# Altium PCB hat_template 2021V3.PcbDoc (part 1 of 2)
Units mil, origin at the board's own origin, x right, y up, seen from the top; angles counter-clockwise.
Board outline 2519.68 x 3346.46 mil, 4 copper layers (Top Side, Ground Plane, Power Plane, Bottom Side), stack 33.234 mil thick; 110 components, 73 nets, 370 pads, 68 vias.
Unrouted connection lines stored in the file: 141.
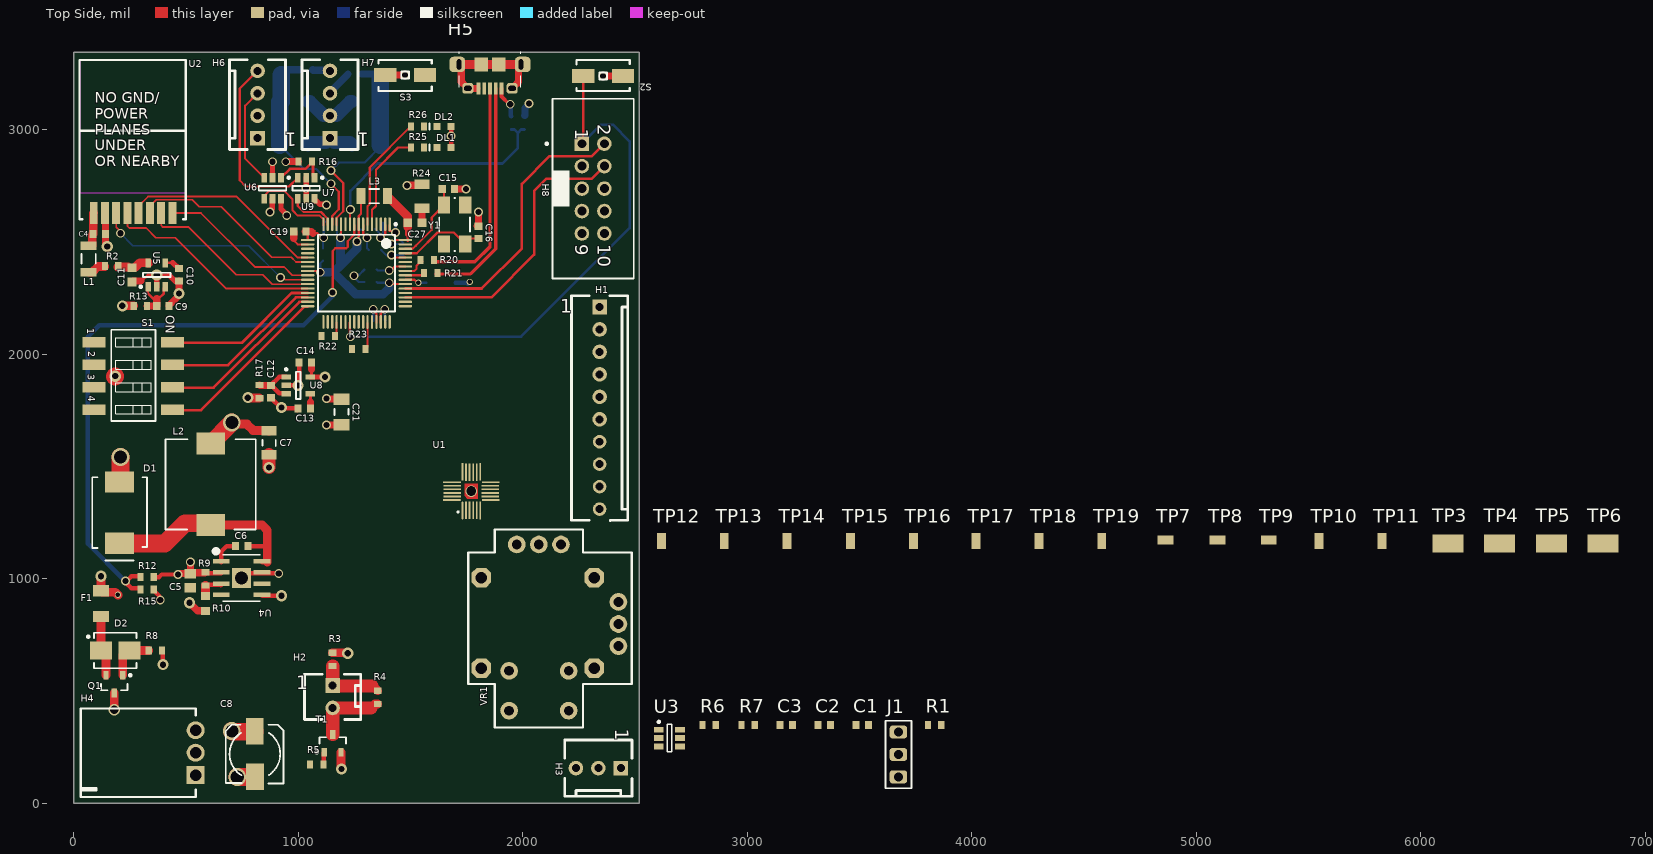
[diagram p0: Top Side view]
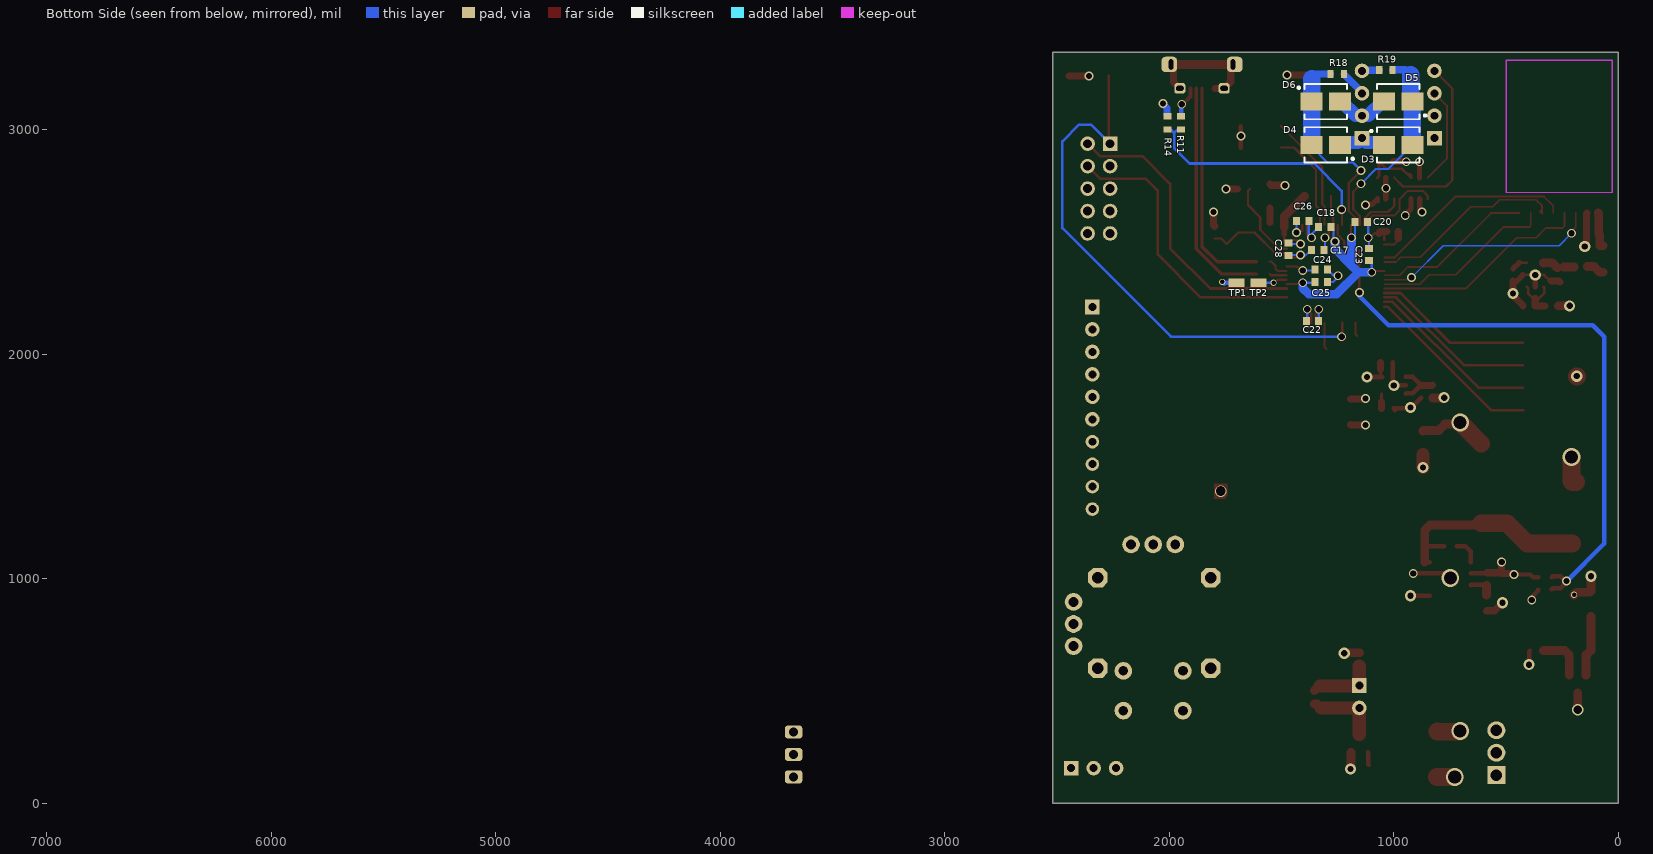
[diagram p1: Bottom Side view, seen from below]
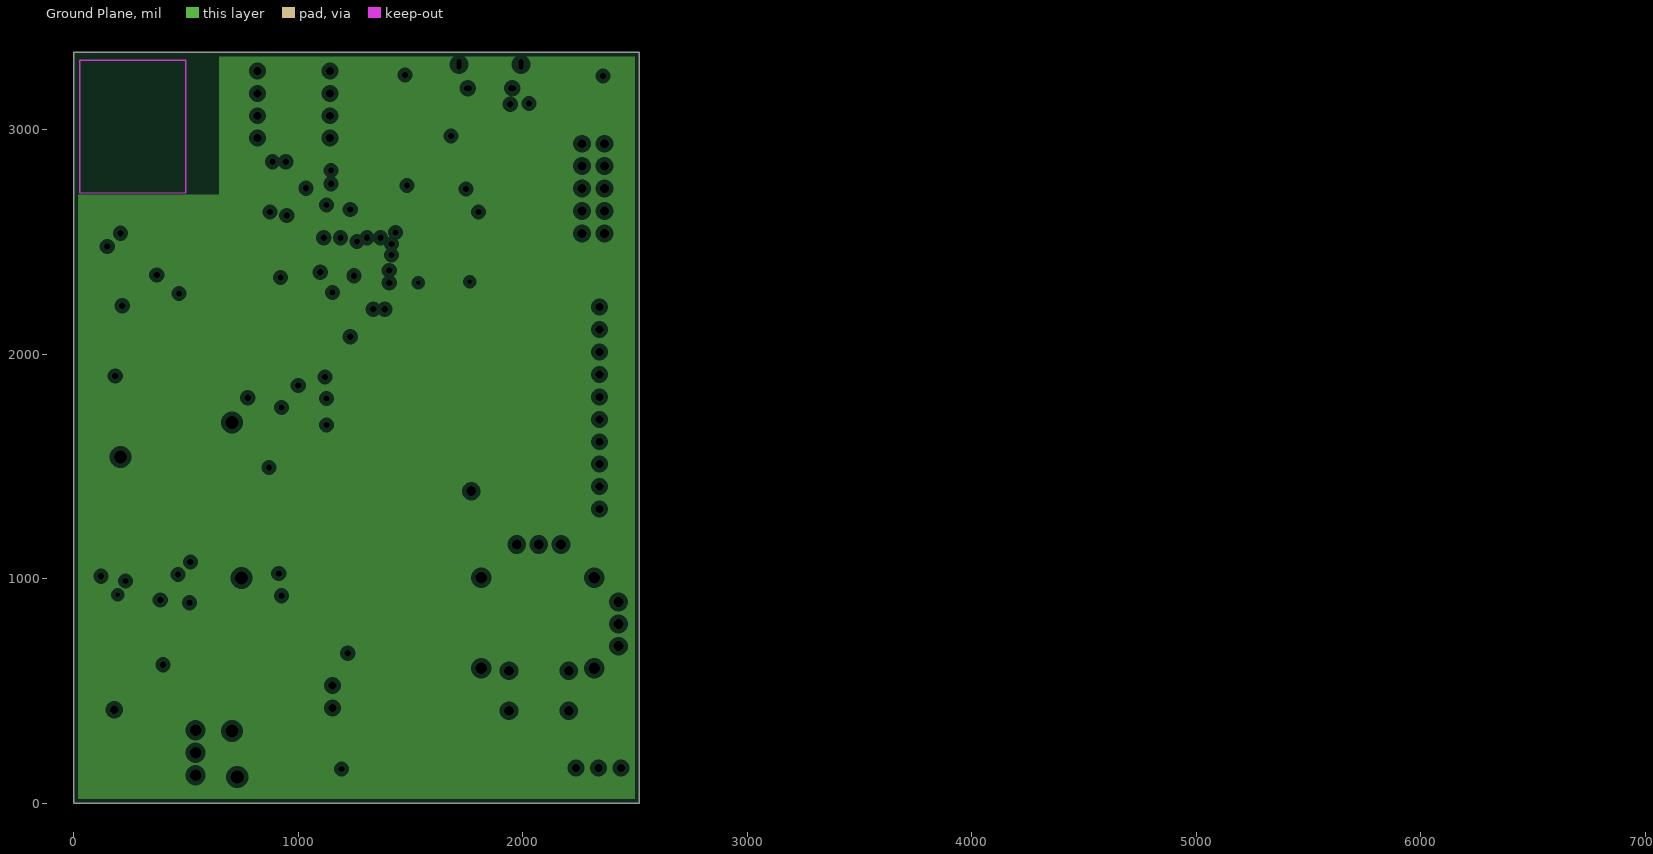
[diagram p2: Ground Plane, clearances drawn from the general rule]
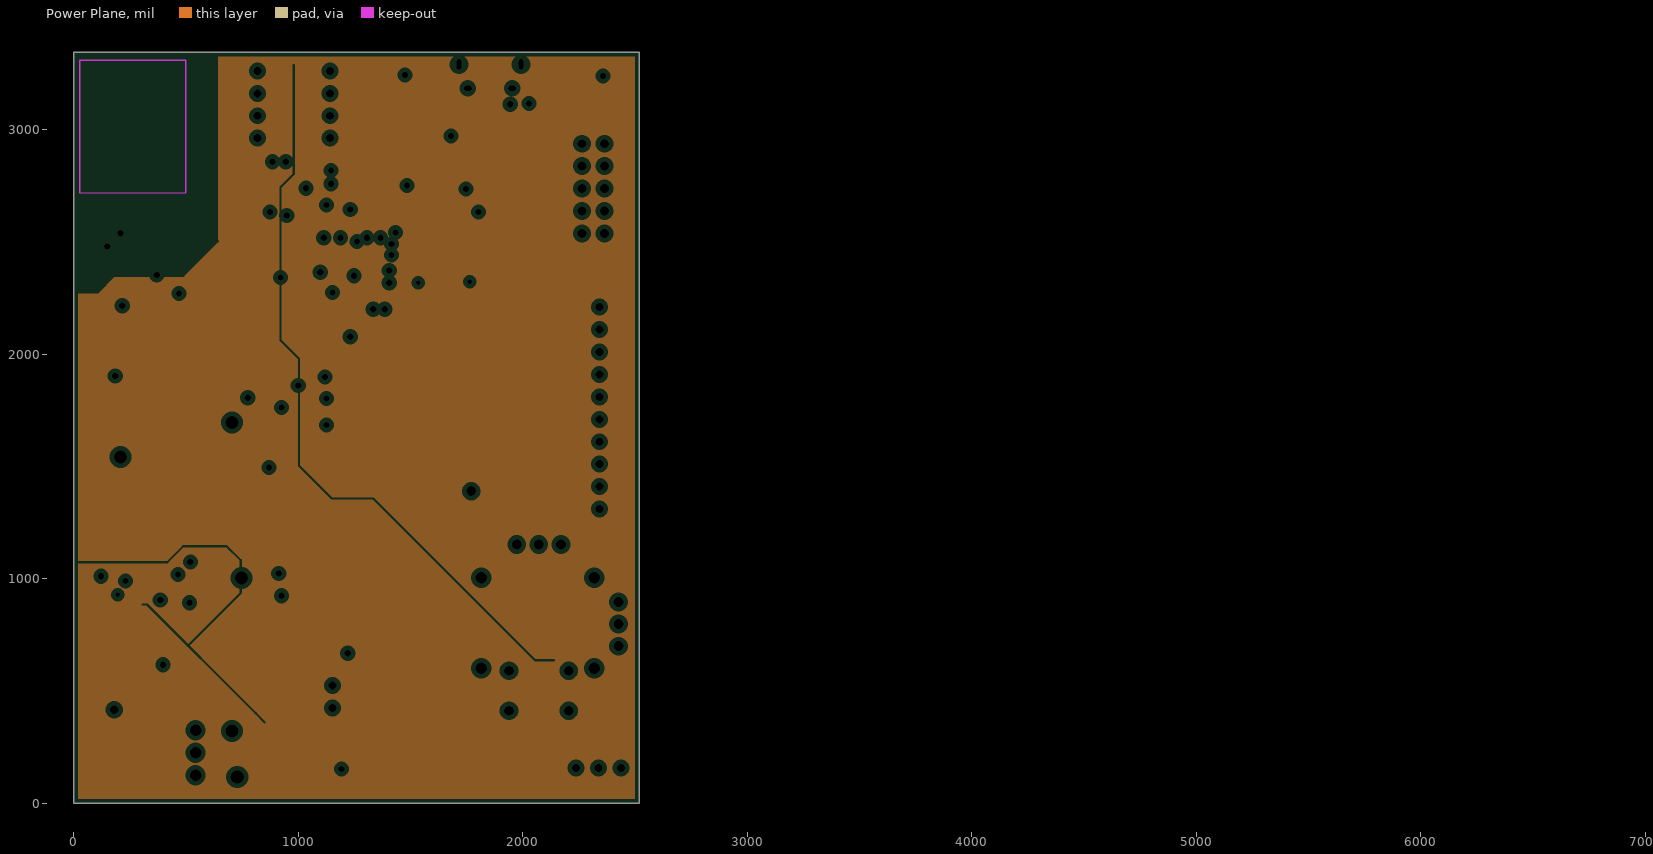
[diagram p3: Power Plane, clearances drawn from the general rule]

## Layer stack, top to bottom
Top Solder: solder mask 0.4, Solder Resist, Dk 3.5
Top Side: signal copper 1.4
Dielectric 1: core 12.6, FR-4, Dk 4.8
Ground Plane: plane copper 1.4169
Dielectric 3: prepreg 5, Dk 4.2
Power Plane: plane copper 1.4169
Dielectric 4: core 10, Dk 4.2
Bottom Side: signal copper 1.4
Bottom Solder: solder mask 0.4, Solder Resist, Dk 3.5

## Board outline
0,3346.46 2519.68,3346.46 2519.68,0 0,0 0,3346.46

## Design rules (kind name [scope] priority, off if disabled: settings)
BoardOutlineClearance [All] p1: gap=19.68 ignorepadtopadclearanceinfootprint=FALSE
Clearance Min_Clearance_Circuit_Labs [All] p1: gap=5.91 ignorepadtopadclearanceinfootprint=FALSE except(0: Arc-Hole Track-Hole SMDPad-Hole THPad-Hole Via-Hole Fill-Hole Poly-Hole Region-Hole Text-Hole)
DiffPairsRouting [All] p1: maxlimit=10 minlimit=10 mostfreqgap=10 toplayer_minwidth=15 toplayer_maxwidth=15 toplayer_prefwidth=15 bottomlayer_minwidth=15 bottomlayer_maxwidth=15 bottomlayer_prefwidth=15 maxuncoupledlength=500
FanoutControl Fanout_BGA [IsBGA] p1 off: bgadir=Out bgaviamode=Centered fanoutstyle=Auto fanoutdirection=Alternating viagrid=1 // Fanout_BGA (Default Rule)
HoleSize [All] p1: absolutevalues=TRUE maxlimit=393.7 minlimit=11.81 maxpercent=80.000 minpercent=20.000
MinimumAnnularRing [All] p1: minimumring=3.94
MinimumSolderMaskSliver [All] p1: minsoldermaskwidth=9.84
NetAntennae [All] p1: netantennaetolerance=39.37
PasteMaskExpansion [All] p1 off: expansion=7.87
PlaneClearance [All] p1: clearance=20
PlaneConnect [All] p1: planeconnectstyle=Relief reliefexpansion=20 reliefentries=4 reliefconductorwidth=10 reliefairgap=10
PolygonConnect [All] p1: connectstyle=Relief reliefconductorwidth=10 reliefentries=4 polygonreliefangle="90 Angle" airgapwidth=10
RoutingVias [All] p1: holewidth=19.68 width=39.37 viastyle="Through Hole" minholewidth=11.81 minwidth=23.62 maxholewidth=39.37 maxwidth=78.74
SMDNeckDown [All] p1 off: percent=50.000
SMDToCorner [All] p1: distance=98425
SMDToPlane [All] p1: distance=1968504
SilkToSolderMaskClearance SilkscreenOverComponentPads [IsPad] p1: minsilkscreentomaskgap=10 clearancetoexposedcopper=TRUE
SolderMaskExpansion [All] p1: expansion=4
ViasUnderSMD [All] p1: allowed=FALSE
Width [All] p1: maxlimit=78.74 minlimit=5.91 preferedwidth=11.81
21 further rules are at their usual default settings.

## Classes and differential pairs
component class SAM4S_Piezo_LED: C15 C16 C17 C18 C19 C20 C21 C22 C23 C24 C25 C26 C27 C28 DL1 DL2 H8 L3 R20 R21 R22 R23 R24 R25 R26 S2 S3 TP1 TP2 TP3 TP4 TP5 TP6 TP7 TP8 TP9 TP10 TP11 TP12 TP13 TP14 TP15 TP16 TP17 TP18 TP19 U9 Y1
component class Power_USB: C5 C6 C7 C8 C9 C10 C11 C12 C13 C14 D1 D2 D3 D4 D5 D6 F1 H4 H5 H6 H7 L2 Q1 R8 R9 R10 R11 R12 R13 R14 R15 R16 R17 R18 R19 U4 U5 U6 U7 U8
component class IMU_Radio: C1 C2 C3 C4 H1 H2 H3 J1 L1 R1 R2 R3 R4 R5 R6 R7 S1 T1 U1 U2 U3 VR1
differential pair D: +D_P -D_N

## Components (designator, comment, footprint, x,y, rotation, side; value= is the part's Value field where it differs from the comment)
C1 "100nF" CAPC1608L 3511.8,350.39 r0 top
C2 "10nF" CAPC1608L 3342.51,350.39 r0 top
C3 "100nF" CAPC1608L 3173.22,350.39 r0 top
C4 "10uF" CAPC1608L 114.17,2535.43 r180 top
C5 "10uF" CAPC2012L 519.68,992.13 r90 top
C6 "100nF" CAPC1608L 748.03,1145.67 r0 top
C7 "47uF" CAPC3216L 870.08,1606.3 r90 top
C8 "100uF/16V" NICH-1 807.09,220.47 r90 top
C9 "1uF" CAPC1608L 397.64,2216.54 r180 top
C10 "10nF" CAPC1608L 468.5,2354.33 r90 top
C11 "4.7uF" CAPC1608N 259.84,2354.33 r90 top
C12 "1uF" CAPC1608L 877.95,1834.65 r90 top
C13 "10nF" CAPC1608L 1027.56,1759.84 r0 top
C14 "2.2uF" CAPC1608L 1031.5,1964.57 r0 top
C15 "27pF" CAPC1608L 1669.29,2736.22 r180 top
C16 "27pF" CAPC1608L 1803.15,2543.31 r270 top
C17 "100nF" CAPC1608L 1338.58,2464.57 r180 bottom
C18 "100nF" CAPC1608L 1307.09,2566.93 r0 bottom
C19 "100nF" CAPC1608L 1007.87,2547.24 r180 top
C20 "100nF" CAPC1608L 1145.67,2590.55 r180 bottom
C21 "22uF" CAPC3216N 1192.91,1744.09 r90 top
C22 "100nF" CAPC1608L 1362.2,2149.61 r180 bottom
C23 "100nF" CAPC1608L 1110.24,2444.88 r90 bottom
C24 "100nF" CAPC1608L 1322.83,2377.95 r0 bottom
C25 "100nF" CAPC1608L 1322.83,2322.83 r180 bottom
C26 "100nF" CAPC1608L 1405.51,2594.49 r0 bottom
C27 "4.7uF" CAPC1608N 1519.68,2586.61 r180 top
C28 "100nF" CAPC1608L 1468.5,2468.5 r90 bottom
D1 "SCHOTTKY 30V 4A" SMC 204.72,1295.28 r270 top
D2 "DIODE ZENER 5.6V" DO-214AA_SCL 185.04,681.1 r0 top
D3 "DIODE ZENER 5.6V" DO-214AA_SCL 980.32,2933.07 r180 bottom
D4 "DIODE ZENER 5.6V" DO-214AA_SCL 1303.15,2933.07 r0 bottom
D5 "DIODE ZENER 5.6V" DO-214AA_SCL 980.32,3125.98 r0 bottom
D6 "DIODE ZENER 5.6V" DO-214AA_SCL 1303.15,3125.98 r180 bottom
DL1 "Blue" WL-SMCW0603 1618.11,2921.26 r0 top
DL2 "Dark Green" WL-SMCW0603 1618.11,3015.75 r0 top
F1 "2A" RESC3216N 122.05,889.76 r90 top
H1 "10 Pin Molex KK Hdr" MOLEX_KK_10_HDR 2342.52,2211.02 r270 top
H2 "2 Pin Molex KK HDR" MOLEX_KK_2_HDR 1153.54,525.2 r270 top
H3 "3 Pin Molex KK Hdr" MOLEX_KK_3_HDR 2437.01,157.48 r180 top
H4 "Battery_HEADER_3pin" BATT_HEADER_3POS 543.31,225.98 r90 top
H5 "JS_USB_MICRO_B" FCI_USB_10118194-0001LF 1854.33,3348.43 r180 top
H6 "4 Pin Molex KK Hdr" MOLEX_KK_4_HDR 818.9,2962.99 r90 top
H7 "4 Pin Molex KK Hdr" MOLEX_KK_4_HDR 1141.73,2962.99 r90 top
H8 "Header 5X2 Vert" IDC2.54-V10D 2313.78,2738.58 r270 top
J1 "100Mil Jumper" JMP2.54-CO 3673.22,118.11 r90 top
L1 "1A max, Idc 0.3R," INDC3216L 66.93,2425.2 r270 top
L2 "IND 5.2UH 6A" INDUCTOR5u2 610.24,1421.26 r90 top
L3 "1A max, Idc 0.3R," INDC3216L 1338.58,2704.72 r180 top
Q1 "SSM3J328R,LF" SOT23_L 181.1,531.5 r270 top
R1 "0R" RESC1608L 3834.63,350.39 r0 top
R2 "0R" RESC1608L 169.29,2393.7 r180 top
R3 "0R" RESC1608L 1153.54,641.73 r90 top
R4 "1K" RESC1608L 1354.33,472.44 r90 top
R5 "0R" RESC1608L 1082.68,173.23 r0 top
R6 "0R" RESC1608L 2830.7,350.39 r0 top
R7 "0R" RESC1608L 3003.93,350.39 r0 top
R8 "270R" RESC1608L 364.17,681.1 r180 top
R9 "15K" RESC1608L 586.61,1000 r90 top
R10 "47K" RESC1608N 586.61,889.76 r90 top
R11 "27K" RESC1608L 1948.82,3031.5 r90 bottom
R12 "36K" RESC1608L 326.77,1007.87 r0 top
R13 "0R" RESC1608L 297.24,2216.54 r0 top
R14 "47K" RESC1608L 2007.87,3031.5 r270 bottom
R15 "24K" RESC1608L 326.77,952.76 r180 top
R16 "0R" RESC1608L 1031.5,2858.27 r180 top
R17 "0R" RESC1608L 826.77,1834.65 r90 top
R18 "360R" RESC1608L 1251.97,3248.03 r180 bottom
R19 "360R" RESC1608L 1035.43,3267.72 r0 bottom
R20 "27R" RESC1608L 1574.8,2421.26 r180 top
R21 "27R" RESC1608L 1590.55,2362.2 r180 top
R22 "2K" RESC1608L 1133.86,2082.68 r180 top
R23 "2K" RESC1608L 1269.69,2023.62 r180 top
R24 "1R" RESC3216L 1551.18,2704.72 r270 top
R25 "360R" RESC1608L 1531.5,2921.26 r180 top
R26 "360R" RESC1608L 1531.5,3015.75 r180 top
S1 "WS_SW DIP-4" "DIP_SW_4WAY_SMD -" 90.55,2054.33 r270 top
S2 "EVQPNF05M" EVQPNF05M 2358.27,3240.16 r0 top
S3 "EVQPNF05M" EVQPNF05M 1476.38,3244.09 r180 top
T1 "BSH105,215" SOT23_L 1153.54,267.72 r90 top
TP1 "TP_0603" TP_0603 1700.79,2318.9 r180 bottom
TP2 "Erase" TP_0603 1602.36,2318.9 r180 bottom
TP3 "GND" TP_1206 6122.03,1157.47 r0 top value=TP
TP4 "GND" TP_1206 6350.38,1157.47 r0 top value=TP
TP5 "GND" TP_1206 6582.66,1157.47 r0 top value=TP
TP6 "GND" TP_1206 6811.01,1157.47 r0 top value=TP
TP7 "3V3 Radio" TP_0603 4862.19,1173.22 r0 top
TP8 "5V" TP_0603 5094.47,1173.22 r0 top
TP9 "VBUS" TP_0603 5322.82,1173.22 r0 top
TP10 "3V3" TP_0603 5547.23,1169.29 r90 top
TP11 "VBATT" TP_0603 5826.76,1169.29 r90 top
TP12 "LED Signal" TP_0603 2618.1,1169.29 r90 top
TP13 "Radio MISO" TP_0603 2897.63,1169.29 r90 top
TP14 "Radio MOSI" TP_0603 3177.16,1169.29 r90 top
TP15 "IMU DATA" TP_0603 3460.62,1169.29 r90 top
TP16 "Buzzer High" TP_0603 3740.15,1169.29 r90 top
TP17 "SWCLK" TP_0603 4019.67,1169.29 r90 top
TP18 "Radio CLK" TP_0603 4299.2,1169.29 r90 top
TP19 "IMU CLK" TP_0603 4578.73,1169.29 r90 top
U1 "Comment" QUAD24 1732,1338 r90 top locked
U2 "nRF24 SMD" NRF24 26.43,2602.36 r0 top
U3 "SN74LVC1T45" SOT23-6_N 2653.53,291.33 r0 top
U4 "Comment" RD_8_1 748.03,1003.94 r0 top locked value=Value
U5 "CAT6219-330TDGT3" SOT95P280X145-5N 370.08,2354.33 r90 top
U6 "SN74LVC1T45" SOT23-6_N 885.83,2740.16 r270 top
U7 "SN74LVC1T45" SOT23-6_N 1035.43,2740.16 r270 top
U8 "CAT6219-330TDGT3" SOT95P280X145-5N 1000,1862.2 r0 top
U9 "Comment" LQFP64_L 1259.84,2362.2 r270 top locked
VR1 "Joystick 10k with Sw" Joystick_Sw 2072.05,1153.54 r90 top
Y1 "12MHz" 6.0X3.5-4 1696.85,2578.74 r90 top

## Footprints (in the part's own frame and the unit in brackets; to place one, negate y for a bottom-side part, rotate by r counter-clockwise, add the part's x,y. Pads: shape width x height; smd on the part's side, far side on the other; paste and mask are expansions set on the pad)
6.0X3.5-4 [mm] "4 SMD 6.0X3.5 mm No Lead Crystal"
  rect 1.9x1.4 smd: 1(-2.2,-1.2) 2(2.2,-1.2) 3(2.2,1.2) 4(-2.2,1.2)
  silkscreen extent -3,-1.75 3,1.75, body extent -3,-1.75 3,1.75, height 1.2
BATT_HEADER_3POS [mil]
  rect 80x80 hole 50: 1(-100,0)
  round 80 hole 50: 2(0,0) 3(100,0)
  silkscreen extent -197,0 197,512
CAPC1608L [mm] "Chip Capacitor, Body 1.6x0.8mm, IPC High Density"
  rect 0.8x0.9 smd: 1(-0.7,0) 2(0.7,0)
  body extent -0.87,-0.48 0.87,0.48, height 0.85
CAPC1608N [mm] "Chip Capacitor, Body 1.6x0.8mm, IPC Medium Density"
  rect 1x1 smd: 1(-0.8,0) 2(0.8,0)
  body extent -0.87,-0.48 0.87,0.48, height 0.85
CAPC2012L [mm] "Chip Capacitor, Body 2.0x1.3mm, IPC High Density"
  rect 1.1x1.3 smd: 1(-0.8,0) 2(0.8,0)
  body extent -1.1,-0.72 1.1,0.72, height 1.1
CAPC3216L [mm] "Chip Capacitor, Body 3.2x1.6mm, IPC High Density"
  rect 1.1x1.7 smd: 1(-1.35,0) 2(1.35,0)
  silkscreen extent -0.35,-0.75 0.35,0.75, body extent -1.7,-0.9 1.7,0.9, height 1.35
CAPC3216N [mm] "Chip Capacitor, Body 3.2x1.6mm, IPC Medium Density"
  rect 1.3x1.8 smd: 1(-1.45,0) 2(1.45,0)
  silkscreen extent -0.35,-0.8 0.35,0.8, body extent -1.7,-0.9 1.7,0.9, height 1.35
"DIP_SW_4WAY_SMD -" [mm] "DIP Switch; 8 Leads"
  rect 1.2x2.6 smd: 1(0,0) 2(2.54,0) 3(5.08,0) 4(7.62,0) 5(7.62,8.89) 6(5.08,8.9) 7(2.54,8.9) 8(0,8.9)
  silkscreen extent -1.4,1.95 8.9,6.95
DO-214AA_SCL [mm] "Molded Diode, 2-Leads, Body 4.40x3.62mm, IPC Medium Density"
  rect 2.5x2.05 smd: 1(-1.6,0) 2(1.6,0)
  silkscreen extent -3.17,-2 2.4,2
EVQPNF05M [mm] "Panansonic light touch SMD push button switch"
  rect 2.5x1.6 smd: 1(-2.25,0) 2(2.25,0)
  silkscreen extent -3,-1.7 3,1.8, body extent -3,-1.7 3,1.8, height 5
FCI_USB_10118194-0001LF [mm] "Micro USB B Type Receptacle"
  rect 0.4x1.35 smd mask+0.07: 1(-1.3,4.15) 2(-0.65,4.15) 3(0,4.15) 4(0.65,4.15) 5(1.3,4.15)
  rrect50% 1.75x1.75 hole 0.5 slot 1.15 at 90 deg copper offset -0.2,0 paste+0 mask+0.1: 6(-3.5,1.45)
  rrect50% 1.25x1.2 hole 0.55 slot 0.85 at 0 deg: 6(-2.5,4.15) 6(2.5,4.15)
  rect 1.5x1.55 smd: 6(-1,1.45) 6(1,1.45)
  rrect50% 1.75x1.75 hole 0.5 slot 1.15 at 90 deg copper offset 0.2,0 paste+0 mask+0.1: 6(3.5,1.45)
  silkscreen extent -3.5,0 3.5,4
IDC2.54-V10D [mm] "Connector; IDC, Low Profile Male Header, Thru-Hole; 10 Position; Vertical; Pitch 2.54 mm; Body 20.32 x 9.2 x 9.45 mm (LxWxH)"
  rect 1.65x1.65 hole 1: 1(-5.08,-1.27)
  round 1.65 hole 1: 2(-5.08,1.27) 3(-2.54,-1.27) 4(-2.54,1.27) 5(0,-1.27) 6(0,1.27) 7(2.54,-1.27) 8(2.54,1.27) 9(5.08,-1.27) 10(5.08,1.27)
  silkscreen extent -10.16,-5.37 10.16,4.6, body extent -10.16,-4.6 10.16,4.6, height 9.45
INDC3216L [mm] "Chip Inductor, Body 3.2x1.6mm, IPC High Density"
  rect 1x1.8 smd: 1(-1.5,0) 2(1.5,0)
  silkscreen extent -0.55,-0.8 0.55,0.8, body extent -1.75,-0.95 1.75,0.95, height 1.9
INDUCTOR5u2 [mm]
  rect 2.5x3.2 smd: 1(-4.6,0) 2(4.6,0)
  silkscreen extent -5.1,-5.1 5.1,5.1
JMP2.54-CO [mm] "Jumper Change over 2.54mm"
  rrect50% 1.5x2 hole 1: 1(0,0) 2(2.54,0) 3(5.08,0)
  silkscreen extent -1.27,-1.47 6.35,1.47, body extent -1.27,-1.43 6.36,1.43, height 8.45
Joystick_Sw [mm]
  round 2 hole 1.1: 1(0,2.5) 2(0,0) 3(0,-2.5) 4(-6.5,-9) 5(-9,-9) 6(-11.5,-9) 7(-14.3,-3.37) 8(-18.8,-3.37) 9(-18.8,3.37) 10(-14.3,3.37)
  oct 2.2x2.2 hole 1.3: 11(-14,-6.25) 12(-3.75,-6.25) 13(-14,6.5) 14(-3.75,6.5)
  silkscreen extent -20.7,-10.5 1.7,8
LQFP64_L [mm] "Thin QFP, 64-Leads, Body 10x10mm, Pitch 0.5mm, IPC High Density"
  oval 1.55x0.25 smd mask+0.07: 1(-5.525,3.75) 2(-5.525,3.25) 3(-5.525,2.75) 4(-5.525,2.25) 5(-5.525,1.75) 6(-5.525,1.25) 7(-5.525,0.75) 8(-5.525,0.25) 9(-5.525,-0.25) 10(-5.525,-0.75) 11(-5.525,-1.25) 12(-5.525,-1.75) 13(-5.525,-2.25) 14(-5.525,-2.75) 15(-5.525,-3.25) 16(-5.525,-3.75) 33(5.525,-3.75) 34(5.525,-3.25) 35(5.525,-2.75) 36(5.525,-2.25) 37(5.525,-1.75) 38(5.525,-1.25) 39(5.525,-0.75) 40(5.525,-0.25) 41(5.525,0.25) 42(5.525,0.75) 43(5.525,1.25) 44(5.525,1.75) 45(5.525,2.25) 46(5.525,2.75) 47(5.525,3.25) 48(5.525,3.75)
  oval 0.25x1.55 smd mask+0.07: 17(-3.75,-5.525) 18(-3.25,-5.525) 19(-2.75,-5.525) 20(-2.25,-5.525) 21(-1.75,-5.525) 22(-1.25,-5.525) 23(-0.75,-5.525) 24(-0.25,-5.525) 25(0.25,-5.525) 26(0.75,-5.525) 27(1.25,-5.525) 28(1.75,-5.525) 29(2.25,-5.525) 30(2.75,-5.525) 31(3.25,-5.525) 32(3.75,-5.525) 49(3.75,5.525) 50(3.25,5.525) 51(2.75,5.525) 52(2.25,5.525) 53(1.75,5.525) 54(1.25,5.525) 55(0.75,5.525) 56(0.25,5.525) 57(-0.25,5.525) 58(-0.75,5.525) 59(-1.25,5.525) 60(-1.75,5.525) 61(-2.25,5.525) 62(-2.75,5.525) 63(-3.25,5.525) 64(-3.75,5.525)
  silkscreen extent -5.65,-4.35 4.35,4.55, body extent -5,-5 5,5, height 1.6
MOLEX_KK_2_HDR [mil] "MOLEX_KK_2_HDR"
  rect 65x65 hole 35.43: 1(0,0)
  round 65 hole 35.43: 2(100,0)
  silkscreen extent -50,-125 152,125, body extent -44,-121 146,119, height 630
MOLEX_KK_3_HDR [mil] "MOLEX_KK_3_HDR"
  rect 65x65 hole 35.43: 1(0,0)
  round 65 hole 35.43: 2(100,0) 3(200,0)
  silkscreen extent -50,-125 250,125, body extent -44,-120 244,119, height 630
MOLEX_KK_4_HDR [mil] "MOLEX_KK_4_HDR"
  rect 65x65 hole 35.43: 1(0,0)
  round 65 hole 35.43: 2(100,0) 3(200,0) 4(300,0)
  silkscreen extent -50,-125 350,125, body extent -44,-119 343,119, height 630
MOLEX_KK_10_HDR [mil] "MOLEX_KK_10_HDR"
  rect 65x65 hole 35.43: 1(0,0)
  round 65 hole 35.43: 2(100,0) 3(200,0) 4(300,0) 5(400,0) 6(500,0)
  round 60 hole 35.43: 7(600,0) 8(700,0) 9(800,0) 10(900,0)
  silkscreen extent -50,-125 951,125, body extent -44,-120 944,120, height 630
NICH-1 [mm] "Electrolytic capacitor"
  rect 3x2 smd: 1(-2.561,-0.022) 2(2.584,0.011)
  silkscreen extent -3.34,-3.25 3.3,3.3, body extent -3.2,-3.2 3.2,3.2, height 5.3
NRF24 [mm]
  rect 0.9x2.5 smd: 1(1.6,0.7) 2(2.871,0.7) 3(4.143,0.7) 4(5.414,0.7) 5(6.686,0.7) 6(7.957,0.7) 7(9.229,0.7) 8(10.5,0.7)
  Keep-Out Layer lines w0.1: 0,3 12,3
  Keep-Out Layer lines w0.15: 0,3 0,18 12,18 12,3
  silkscreen extent 0,0 12,18
QUAD24 [mm]
  oval 2x0.2 smd paste+0.02 mask+0.015: 1(-0.85,0)
  rect 2x0.2 smd paste+0.02 mask+0.015: 2(-0.8,-0.4) 3(-0.8,-0.8) 4(-0.8,-1.2) 5(-0.8,-1.6) 14(3.5,-1.6) 15(3.5,-1.2) 16(3.5,-0.8) 17(3.5,-0.4)
  rrect50% 2x0.2 smd paste+0.02 mask+0.015: 6(-0.85,-2) 13(3.55,-2) 18(3.55,0)
  rrect50% 0.2x2 smd paste+0.02 mask+0.015: 7(0.35,-3.2) 12(2.35,-3.2) 19(2.35,1.2) 24(0.35,1.2)
  rect 0.2x2 smd paste+0.02 mask+0.015: 8(0.75,-3.15) 9(1.15,-3.15) 10(1.55,-3.15) 11(1.95,-3.15) 20(1.95,1.15) 21(1.55,1.15) 22(1.15,1.15) 23(0.75,1.15)
  Top Side region: 0.5,-1.75 0.5,-0.55 0.8,-0.25 2.2,-0.25 2.2,-1.75
  silkscreen extent -1.05,0.45 -0.95,0.55
RD_8_1 [mil]
  rect 74x20 smd paste+0 mask+0: 1(-91,75) 2(-91,25) 3(-91,-25) 4(-91,-75) 5(91,-75) 6(91,-25) 7(91,25) 8(91,75)
  rect 84.65x90 smd paste-44.5 mask+0: EPAD(0,0)
  silkscreen extent -118,-104 84,123, body extent 0,0 10,10, height 10
RESC1608L [mm] "Chip Resistor, Body 1.6x0.8mm, IPC High Density"
  rect 0.7x0.9 smd: 1(-0.75,0) 2(0.75,0)
  body extent -0.85,-0.48 0.85,0.48, height 0.9
RESC1608N [mm] "Chip Resistor, Body 1.6x0.8mm, IPC Medium Density"
  rect 0.9x1 smd: 1(-0.85,0) 2(0.85,0)
  body extent -0.85,-0.48 0.85,0.48, height 0.6
RESC3216L [mm] "Chip Resistor, Body 3.1x1.6mm, IPC High Density"
  rect 1.1x1.7 smd: 1(-1.35,0) 2(1.35,0)
  body extent -1.68,-0.87 1.68,0.87, height 2.54
RESC3216N [mm] "Chip Resistor, Body 3.2x1.6mm, IPC Medium Density"
  rect 1.3x1.8 smd: 1(-1.45,0) 2(1.45,0)
  body extent -1.68,-0.87 1.68,0.87, height 0.71
SMC [mm] "DO-214-AB/SMC; 2 C-Bend Leads; Body 7.9 x 5.9 mm, inc. leads (LxW)"
  rect 2.4x3.3 smd: 1(-3.475,0) 2(3.475,0)
  silkscreen extent -4,-3.1 5.43,3.1
SOT23-6_N [mm]
  rect 1.1x0.65 smd: 1(-1.2,0.95) 2(-1.2,0) 3(-1.2,-0.95) 4(1.2,-0.95) 5(1.2,0) 6(1.2,0.95)
  silkscreen extent -1.32,-1.55 0.25,1.95, body extent -0.9,-1.55 0.9,1.55, height 1.45
SOT23_L [mm] "SOT23, 3-Leads, Body 2.9x1.3mm, Pitch 0.95mm, Lead Span 2.3mm, IPC High Density"
  rect 1x0.6 smd: 1(-1,0.95) 2(-1,-0.95) 3(1,0)
  silkscreen extent -1.12,-1.5 0.7,1.93, body extent -0.7,-1.5 0.7,1.5, height 1.1
SOT95P280X145-5N [mm] "SOT23, 5-Leads, Body 2.90x2.80mm, Pitch 0.95mm, IPC Medium Density"
  rect 1.05x0.6 smd: 1(-1.35,0.95) 2(-1.35,0) 3(-1.35,-0.95) 4(1.35,-0.95) 5(1.35,0.95)
  silkscreen extent -1.47,-1.55 0.25,1.92, body extent -0.87,-1.52 0.87,1.53, height 1.45
TP_0603 [mm] "TestPoint 0603"
  rect 1.8x1 smd: 1(0,0)
  body extent -1,-0.6 1,0.6, height 0.9
TP_1206 [mm] "Test Point Pad"
  rect 3.5x2 smd: 1(0,0)
  body extent -1.62,-0.85 1.63,0.8, height 2
WL-SMCW0603 [mm] "2.4 x 0.8 x 0.7mm LED"
  rect 0.8x0.8 smd: 1(0,0) 2(1.6,0)
  silkscreen extent -0.85,-0.35 -0.85,0.35

## Part data
C1 C3 C6 C17 C18 C19 C20 C22 C23 C24 C25 C26 C28: library part CC_100nF_0603, "CAP CER 100nF X7R +-10% 50V 0603", Code_IPC="1608 [0603]", PackageReference=0603, Storage Location="PCB Assembly WS", Supplier="ECE Dept"
C2 C10 C13: library part CC_10nF_0603, "CAP CER 10nF X7R +-10% 50V 0603", Code_IPC="1608 [0603]", PackageReference=0603, Storage Location="PCB Assembly WS", Supplier="ECE Dept"
C4: library part CC_10uF_0603, "CAP CER 10UF X5R +-20% 6V3 0603", Voltage - Rated=6.3V, Storage Location="PCB Assembly WS", Supplier="ECE Dept"
C5: library part CC_10uF_0805_10V, "CAP CER 10uF X7R +-20% 10V 0805", Max Voltage=10V, Code_IPC=2012[0805], Note="Footprint corresponds to dimensions for bulk cassette packaging. This case size has tightened tolerances.", PackageReference=0805, Storage Location="PCB Assembly WS", Supplier="ECE Dept"
C7: library part CC_47uF_1206, "CAP CER 47uF X5R -/+20% 6V 1206", Dielectric=X5R, Max Voltage=6V, MoV=6V, Storage Location="PCB Assembly WS", Supplier="ECE Dept"
C8: library part CA_100uF_16V, "CAP ALUM 100uF 16V SMD", Manufacturer=Nichcon, Manufacturer PN=UWX1C101MCL1GB, Supplier Part Number 1=1870677, Storage Location="PCB Assembly WS", Supplier="ECE Dept", Supplier 1=Farnell, Supplier 2=Digi-Key, Supplier Part Number 2=493-2105-1-ND
C9 C12: library part CC_1uF_0603, "CAP CER 1uF Y5V -20% +80% 16V 0603", Max Voltage=16V, Code_IPC="1608 [0603]", PackageReference=0603, Storage Location="PCB Assembly WS", Supplier="ECE Dept"
C11 C27: library part CC_4.7uF_0603, "CAP CER 4.7uF X5R +-20%  10V 0603", Max Voltage=10V, Code_IPC=2012[0805], Note="Footprint corresponds to dimensions for bulk cassette packaging. This case size has tightened tolerances.", PackageReference=0805, Storage Location="PCB Assembly WS", Supplier="ECE Dept"
C14: library part CC_2.2uF_0603, "CAP CER 2.2uF X5R +-20% 10V 0603", Max Voltage=10V, Code_IPC="1608 [0603]", PackageReference=0603, Storage Location="PCB Assembly WS", Supplier="ECE Dept"
C15 C16: library part CC_27pF_0603, "CAP CER 27pF NPO/COG +-5% 50V 0603", Code_IPC="1608 [0603]", PackageReference=0603, Storage Location="PCB Assembly WS", Supplier="ECE Dept"
C21: library part CC_22uF_1206, "CAP CER 22uF Y5V -20% +80% 10V 1206", Dielectric=Y5V, Max Voltage=10V, Storage Location="PCB Assembly WS", Supplier="ECE Dept"
D1: library part MBRS330T3G, "DIODE SCHOTTKY 30V 4A SMC", Base Part Number=MBRS330, Capacitance @ Vr, F=-, Current - Average Rectified (Io)=4A, Manufacturer="ON Semiconductor", Operating Temperature - Junction="-65°C ~ 150°C", Package / Case="DO-214AB, SMC", Supplier Device Package=SMC, Supplier Part Number 1=MBRS330T3GOSCT-ND, Category="Discrete Semiconductor Products", ComponentLink1Description=http://www.onsemi.com/pub/Collateral/MBRS340T3-D.PDF, ComponentLink1URL=http://www.onsemi.com/pub/Collateral/MBRS340T3-D.PDF, Diode Type=Schottky, Manufacturer Part Number=MBRS330T3G, Mounting Type="Surface Mount", Packaging="Cut Tape (CT)", Part Status=Active, Pricing 1="1=0.93, 10=0.79, 100=0.5902, 500=0.46368, 1000=0.35829 (NZD)", RoHS="RoHS Compliant", Speed="Fast Recovery =< 500ns, > 200mA (Io)", Stock 1=8919, Supplier 1=Digi-Key
D2 D3 D4 D5 D6: library part SMBJ5339B-TP, "DIODE ZENER 5.6V 5W DO214AA", Base Part Number=SMBJ5339, Manufacturer="Micro Commercial Co", Operating Temperature="-55°C ~ 150°C", Package / Case="DO-214AA, SMB", Supplier Device Package="DO-214AA (SMB)", Supplier Part Number 1=SMBJ5339B-TPMSCT-ND, Tolerance=±5%, Category="Discrete Semiconductor Products", ComponentLink1Description=http://www.mccsemi.com/up_pdf/SMBJ5338B-SMBJ5388B(SMB).pdf, ComponentLink1URL=http://www.mccsemi.com/up_pdf/SMBJ5338B-SMBJ5388B(SMB).pdf, Manufacturer Part Number=SMBJ5339B-TP, Mounting Type="Surface Mount", Packaging="Cut Tape (CT)", Part Status=Active, Pricing 1="1=1.47, 10=1.277, 25=1.1312, 100=0.9853, 250=0.85764, 500=0.72988, 1000=0.58391 (NZD)", RoHS="RoHS Compliant", Stock 1=85990, Supplier 1=Digi-Key
DL1: library part DL_150060BS75000, "LED Blue 270mcd 0603 SMD", Forward Current If=30, Forward Voltage=3.2, Manufacturer="WURTH ELEKTRONIK", Manufacturer Part Number=150060BS75000, Supplier Part Number 1=2322069, LED Colour=Blue, Luminous Intensity=270, Pricing="1=0.3844, 50=0.3252, 100=0.2957, 500=0.2365 (NZD)", Storage Location="PCB Assembly WS", Supplier="ECE Dept", Supplier 1=Farnell, Viewing Angle=120°, Wavelength Typ=470
DL2: library part DL_150060GS75000, "LED Dk Green 430mcd 0603 SMD", Forward Current If=30, Forward Voltage=3.2, Manufacturer="WURTH ELEKTRONIK", Manufacturer Part Number=150060GS75000, Supplier Part Number 1=2322070, LED Colour="Dark Green", LED Mounting=SMD, Lens Shape=Rectangular, Luminous Intensity=430, Storage Location="PCB Assembly WS", Supplier="ECE Dept", Supplier 1=Farnell, Viewing Angle=140°, Wavelength Typ=520
F1: library part FS_Fuse_2.0A, "Fuse 2.0A Very Fast Acting 1206 SMD", Manufacturer=MULTICOMP, Manufacturer Part Number="MC12CF 002", Supplier Part Number 1=1841029, Manufacturer PN="MC12CF 002", Storage Location="PCB Assembly WS", Supplier="ECE Dept", Supplier 1=Farnell
H1: library part JA_MOLEX_KK_10POS, "CONN HEADER 10POS 2.54mm VERT_ Thru Hole", Supplier Part Number 1=1756828, Storage Location="ECE Dept Store", Supplier="ECE Dept", Supplier 1=Farnell
H2: library part JA_MOLEX_KK_2POS, "CONN HEADER 2POS 2.54mm VERT_Thru Hole", Supplier Part Number 1=1462926, Storage Location="ECE Dept Store", Supplier="ECE Dept", Supplier 1=Farnell
H3: library part JA_MOLEX_KK_3POS, "CONN HEADER 3POS 2.54mm VERT_Thru Hole", Manufacturer=Molex, Manufacturer PN=22-23-2031, Supplier Part Number 1=9731156, Storage Location="ECE Dept Store", Supplier="ECE Dept", Supplier 1=Farnell
H4: "3Pin Header 2.54mm spacing"
H5: library part JS_USB_MICRO_B_SMT, "CONN USB MICRO B RECPT SMT R/A", Manufacturer=FCI, Manufacturer Part Number=10118194-0001LF, Supplier Part Number 1=609-4618-1-ND, Features="Shielded, Solder Retention", Gender=Receptacle, Mounting Type="Surface Mount, Right Angle, Horizontal", Number of Contacts=5, Specifications="USB 2.0", Supplier 1=Digi-Key
H6 H7: library part JA_MOLEX_KK_4POS, "CONN HEADER 4POS 2.54mm VERT_Thru Hole", Manufacturer=Molex, Manufacturer PN=22-23-2041, Supplier Part Number 1=9731164, Storage Location="ECE Dept Store", Supplier="ECE Dept", Supplier 1=Farnell
H8: library part JA_HDR_IDC_5X2_VERT, "IDC Header, 2,54mm, 10-Pin, Vert", Supplier Part Number 1=1096985, Storage Location="ECE Dept Store", Supplier="ECE Dept", Supplier 1=Farnell
J1: library part TP_JUMPER_CO, "2.54mm Jumper change over, Thru Hole", Storage Location="ECE$ Store", Supplier="ECE Dept"
L1 L3: library part IN_Ferrite-Bead, "Ferrite Bead, Rdc 0.3R, Z100MHZ 600R, Imax 1A, SMD 1206", DC Current Rating=1, DC Resistance Max=0.08, Ferrite Case Style="1206 ^3216 Metric]", Frequency Range="50MHz to 1", Impedance Tolerance="± 25%", Manufacturer=FAIR-RITE, Manufacturer Part Number=2512066017Y1, Supplier Part Number 1=1612060, Ferrite Mounting=SMD, Impedance=600, Manufacturer PN=2512066017Y1, Storage Location="PCB Assembly WS", Supplier="ECE Dept", Supplier 1=Farnell
L2: library part CDRH104RNP-5R2NC, "FIXED IND 5.2UH 6A 22 MOHM SMD", Current - Saturation=5.6A, DC Resistance (DCR)="22 mOhm Max", Frequency - Self Resonant=-, Manufacturer="Sumida America Components Inc.", Operating Temperature="-40°C ~ 100°C", Package / Case=Nonstandard, Supplier Part Number 1=308-2280-1-ND, Tolerance=±30%, Category="Inductors, Coils, Chokes", ComponentLink1Description=http://products.sumida.com/products/pdf/CDRH104R.pdf, ComponentLink1URL=http://products.sumida.com/products/pdf/CDRH104R.pdf, Height - Seated (Max)="0.157\" (4.00mm)", Manufacturer Part Number=CDRH104RNP-5R2NC, Material - Core=Ferrite, Mounting Type="Surface Mount", Packaging="Cut Tape (CT)", Part Status=Active, Pricing 1="1=2.9, 10=2.678, 100=1.8743, 500=1.5173 (NZD)", Q @ Freq=-, Ratings=-, RoHS="RoHS Compliant", Shielding=Shielded, Size / Dimension="0.402\" L x 0.394\" W (10.20mm x 10.00mm)", Stock 1=3849, Supplier 1=Digi-Key, Supplier Device Package=-, Type=-
Q1: library part TM_SSM3J328R, "MOSFET P-CH 20V 6A SOT23-3", Case/Package=SOT-23-3, Continuous Drain Current (ID)=6A, Drain to Source Breakdown Voltage=-20V, Drain to Source Resistance=47.4mR, Drain to Source Voltage (Vdss)=20V, Gate to Source Voltage (Vgs)=8V, Input Capacitance=840pF, Input Capacitance (Ciss) @ Vds="840pF @ 10V", Manufacturer=Toshiba, Max Operating Temperature=150°C, Max Power Dissipation=1W, Min Operating Temperature=-55°C, Package / Case="SOT-23-3 Flat Leads", Package Quantity=3000, Power Dissipation=2W, Supplier Device Package=SOT-23F, Supplier Part Number=SSM3J328RLFDKR-ND, ComponentLink1Description=https://datasheet.ciiva.com/11158/ssm3j328r-datasheet-en-20140301-11158652.pdf, ComponentLink1URL=https://datasheet.ciiva.com/11158/ssm3j328r-datasheet-en-20140301-11158652.pdf, Current - Continuous Drain (Id) @ 25° C=6A, Element Configuration=Single, FET Feature="Logic Level Gate, 1.5V Drive", FET Type="MOSFET P-Channel, Metal Oxide", Gate Charge (Qg) @ Vgs="12.8nC @ 4.5V", Manufacturer Part Number=SSM3J328R,LF, Mount="Surface Mount", Number of Channels=1, Number of Elements=1, Number of Pins=3, Packaging="Tape and Reel", Power - Max=1W, Pricing="1=0.79, 10=0.658, 25=0.5772, 100=0.4939, 250=0.42836, 500=0.36284, 1000=0.27972 (NZD)", Radiation Hardening=No, Rds On Max=29.8mR, Storage Location="PCB Assembly WS", Supplier=Digi-Key, Supplier 1=Digi-Key, Supplier Part Number 1=SSM3J328RLFDKR-ND, Turn-Off Delay Time=107ns, Turn-On Delay Time=32ns, Vgs(th) (Max) @ Id="1V @ 1mA"
R1 R2 R3 R5 R6 R7 R13 R16 R17: library part RS_0R0, "RES 0.0 OHM 1/10W 5% 0603 SMD", Storage Location="PCB Assembly WS", Supplier="ECE Dept"
R4: library part RS_1K, "RES 1.0K OHM 1/10W 5% 0603 SMD", Storage Location="PCB Assembly WS", Supplier="ECE Dept"
R8: library part RS_270R, "RES 270 OHM 1/10W 5% 0603 SMD", Storage Location="PCB Assembly WS", Supplier="ECE Dept"
R9: library part RS_15K, "RES 15.0K OHM 1/10W 5% 0603 SMD", Storage Location="PCB Assembly WS", Supplier="ECE Dept"
R10 R14: library part RS_47K, "RES 47.0K OHM 1/10W 5% 0603 SMD", Storage Location="PCB Assembly WS", Supplier="ECE Dept"
R11: library part RS_27K, "RES 27K OHM 1/10W 5% 0603 SMD", Storage Location="PCB Assembly WS", Supplier="ECE Dept"
R12: library part RS_36K, "RES 36K OHM 1/10W 5% 0603 SMD", Storage Location="PCB Assembly WS", Supplier="ECE Dept"
R15: library part RS_24K, "RES 24K OHM 1/10W 5% 0603 SMD", Storage Location="PCB Assembly WS", Supplier="ECE Dept"
R18 R19 R25 R26: library part RS_360R, "RES 360 OHM 1/10W 5% 0603 SMD", Storage Location="PCB Assembly WS", Supplier="ECE Dept"
R20 R21: library part RS_27R, "RES 27 OHM 1/10W 5% 0603 SMD", Storage Location="PCB Assembly WS", Supplier="ECE Dept"
R22 R23: library part RS_2K, "RES 2K OHM 1/10W 5% 0603 SMD", Storage Location="PCB Assembly WS", Supplier="ECE Dept"
R24: library part RT_1R, "RES 1R OHM 1/4W 5% 1206 SMD", Storage Location="PCB Assembly WS", Supplier="ECE Dept"
S1: "DIP Switch, 4 Position, SPST SMD", Contact Current DC Max=25, Manufacturer="OMRON ELECTRONIC COMPONENTS", Manufacturer Part Number=A6SN-4101, Supplier Part Number 1=2029425, Contact Configuration=SPST, External Length / Height=12.1, No. of Switch Positions=4, Pitch Spacing=2.54, Storage Location="PCB Assembly WS", Supplier="ECE Dept", Supplier 1=Farnell
S2 S3: library part WS_EVQPNF05M, "Panasonic 6 x 3.5mm SMD Light Touch Switch Type SMD", Manufacturer=Panasonic, Supplier Part Number 1=2079481, Manufacturer PN=EVQPNF05M, PackageDescription="6.0 x 3.5 mm", Storage Location="PCB Assembly WS", Supplier="ECE Dept", Supplier 1=Farnell, Supplier 2=Digi-Key, Supplier Part Number 2=P13598SCT-ND
T1: library part TM_BSH105, "MOSFET N-CH 20V 1.05A SOT-23", Current - Continuous Drain (Id) @ 25° C=1.05A, Drain to Source Voltage (Vdss)=20V, Input Capacitance (Ciss) @ Vds="152pF @ 16V", Manufacturer="NXP Semiconductors", Package / Case="TO-236-3, SC-59, SOT-23-3", Power - Max=417mW, Supplier Part Number 1=1758066, FET Type="MOSFET N-Channel, Metal Oxide", Gate Charge (Qg) @ Vgs="3.9nC @ 4.5V", Manufacturer Part Number=BSH105,215, Pricing="1=0.53, 10=0.42, 25=0.3544, 100=0.2885, 250=0.23896, 500=0.1974, 1000=0.14785 (NZD)", Rds On (Max) @ Id, Vgs="200 mOhm @ 600mA, 4.5V", Storage Location="PCB Assembly WS", Supplier="ECE Dept", Supplier 1=Farnell, Supplier 2=Digi-Key, Supplier Part Number 2=568-6215-1-ND
TP1: "Test Point 1.65X0.9X1.2mm SMD", Manufacturer="TE Connectivity AMP Connectors", Manufacturer Part Number=1625854-3, Supplier Part Number 1=A106145CT-ND, Mounting Type="Surface Mount", Supplier 1=Digi-Key, Terminal="0.063\" x 0.031\" x 0.045\" (1.60mm x 0.80mm x 1.15mm)", Type="PC Test Point"
TP2 TP7 TP8 TP9 TP10 TP11 TP12 TP13 TP14 TP15 TP16 TP17 TP18 TP19: library part TP_0603, "Test Point 1.65X0.9X1.2mm SMD", Manufacturer="TE Connectivity AMP Connectors", Manufacturer Part Number=1625854-3, Supplier Part Number 1=A106145CT-ND, Mounting Type="Surface Mount", Supplier 1=Digi-Key, Terminal="0.063\" x 0.031\" x 0.045\" (1.60mm x 0.80mm x 1.15mm)", Type="PC Test Point"
TP3 TP4 TP5 TP6: library part TP_1206, "Test-Point 3.3x1.6x2.1mm SMD", Manufacturer="Harwin Inc", Manufacturer Part Number=S1751-46R, Supplier Part Number 1=952-1478-2-ND, Mounting Type="Surface Mount", Storage Location=ProtoPlace, Supplier="ECE Dept", Supplier 1=Digi-Key, Supplier 2=Farnell, Supplier Part Number 2=1826282, Type="PC Test Point"
U1: library part MPU-9250, "9 axis IMU"
U2: library part NRF24, "nRF24 SMD Module", Warning="No power planes near or under device"
U3 U6 U7: "1.8V - 5V level converter"
U4: library part ADP2302ARDZ-5.0-R7, "IC REG BUCK 5V 2A 8SOIC", Current - Output=2A, Frequency - Switching=700kHz, Supplier Part Number 1=ADP2302ARDZ-5.0-R7CT-ND, Voltage - Input (Max)=20V, Voltage - Output (Min/Fixed)=5V, Manufacturer_Part_Number=ADP2302ARDZ-5.0-R7, Output Type=Fixed, Supplier 1=Digi-Key, Type=DEV, Vendor="Analog Devices Inc"
U5 U8: library part SV_CAT6219-330TDGT3, "IC REG LIN 3.3V 500MA TSOT23-5", Base Part Number=CAT6219, Current - Output=500mA, Package / Case="SOT-23-5 Thin, TSOT-23-5", Supplier Device Package=TSOT-23-5, Supplier Part Number=CAT6219-330TDGT3CT-ND, Voltage - Input (Max)=5.5V, Voltage - Output (Min/Fixed)=3.3V, Voltage Dropout (Max)="0.5V @ 500mA", ComponentLink1Description=http://www.onsemi.com/pub/Collateral/CAT6219-D.PDF, ComponentLink1URL=http://www.onsemi.com/pub/Collateral/CAT6219-D.PDF, Manufacturer Part Number=CAT6219-330TDGT3, Supplier=Digi-Key, Supplier 1=Digi-Key
U9: library part SE_ATSAM4S16BA-MU, "IC MCU 32BIT 512KB FLASH 64LQFP", Manufacturer=Atmel, Manufacturer Part Number=ATSAM4S8BA-ANR, Package / Case=64-LQFP, Supplier Part Number 1=ATSAM4S8BA-ANRCT-ND, Voltage - Supply (Vcc/Vdd)="1.62 V ~ 3.6 V", Code_JEDEC=MO-220VMMD-3, ComponentLink1Description="Manufacturer URL", ComponentLink1URL=http://www.atmel.com/, ComponentLink2Description="SAM4S Series Datasheet", ComponentLink2URL=http://www.atmel.com/dyn/resources/prod_documents/11100.pdf, ComponentLink3Description="SAM4S Series Summary", ComponentLink3URL=http://www.atmel.com/dyn/resources/prod_documents/11100S.pdf, Connectivity="I²C, IrDA, Memory Card, SPI, SSC, UART/USART, USB", Core Processor="ARM® Cortex®-M4", Core Size=32-Bit, Data Converters="A/D 11x12b, D/A 2x12b", Number of I/O=47, PackageDescription="64-Pin Quad Flat No-Lead (QFN) Sawn, 9 x 9 x 1.0 mm Body, 0.5 mm Pitch, Exposed Pad", PackageReference=64PS, PackageVersion="revJ, Jul-2007", Packaging="Cut Tape (CT)", Peripherals="Brown-out Detect/Reset, DMA, POR, PWM, WDT", Program Memory Size="512KB (512K x 8)", Program Memory Type=FLASH, RAM Size="128K x 8", Speed=120MHz, Supplier 1=Digi-Key
VR1: "JOYSTICK 10K OHM 2 AXIS TH", Manufacturer 1=SparkFun, Manufacturer Part Number 1=COM-09032, Supplier Part Number 1=1568-1526-ND, ComponentLink1Description=https://media.digikey.com/pdf/Data%20Sheets/Sparkfun%20PDFs/COM-09032_Web.pdf?src-supplier=Digi-Key, ComponentLink1URL=https://media.digikey.com/pdf/Data%20Sheets/Sparkfun%20PDFs/COM-09032_Web.pdf?src-supplier=Digi-Key, Pricing 1="1=3.95000 (USD)", RoHS=No, Stock 1=563, Supplier 1=Digi-Key
Y1: library part XT_CRYSTAL_12MHz_18pF, "CRYSTAL 12MHZ 18PF 6X3.5mm SMD", ESR (Equivalent Series Resistance)="60 Ohm", Frequency Stability=±50ppm, Frequency Tolerance=±30ppm, Load Capacitance=18pF, Manufacturer="CTS-Frequency Controls", Manufacturer Part Number=406C35D12M00000, Operating Mode=Fundamental, Operating Temperature="-20°C ~ 70°C", Package / Case="4-SMD, No Lead (DFN, LCC)", Supplier Part Number 1=CTX855CT-ND, Frequency=12MHz, Height="0.047\" (1.20mm)", Mounting Type="Surface Mount", Size / Dimension="0.236\" L x 0.138\" W (6.00mm x 3.50mm)", Supplier 1=Digi-Key

## Via types
v1: diameter 39.37, hole 27.56, Top Side to Bottom Side, 42 vias
v2: diameter 49.21, hole 27.56, Top Side to Bottom Side, 9 vias
v3: diameter 50, hole 27.56, Top Side to Bottom Side, 7 vias
v4: diameter 78.74, hole 59.06, Top Side to Bottom Side, 5 vias
v5: diameter 27.56, hole 19.68, Top Side to Bottom Side, 3 vias
v6: diameter 50, hole 39.37, Top Side to Bottom Side, 1 vias
v7: diameter 51.18, hole 43.31, Top Side to Bottom Side, 1 vias

## Nets (pads, with @x,y where several pads share a name; then routed paths per layer and width w, separated by ;. In a path a pad name is that pad's centre, name@x,y a point inside that pad or via, vN(x,y) a via of type N, cw(c..) or ccw(c..) an arc to the next point about the centre after c; other vN are vias at no path point)
"3.3V IMU": C1.2 C2.2 H1.9 J1.3 R1.1 U1.1 U1.8 U1.13 U1.22
"3.3V Joystick": J1.1 VR1.1 VR1.4
3V3: C14.2 C17.2 C19.2 C21.2 C22.2 C24.2 C26.2 D3.1 D4.1 DL1.2 DL2.2 H7.1 H8.7 H8.8 J1.2 R6.2 R22.2 R23.2 TP1.1 TP10.1 U6.6 U7.6 U8.5 U9.1 U9.7 U9.18 U9.45 U9.58 | length 1300.5
  Top Side w9.84: 984.25,2503.94 984.25,2503.53 997.63,2490.16 U9.18 ; U9.7@1289.37,2575.79 1289.37,2535.03 1304.72,2519.68 v1(1307.08,2519.68) ; v1(1334.64,2200.78) 1334.64,2195.29 1348.43,2181.51 U9.45 U9.45@1348.43,2140.75 ; U9.1@1407.48,2575.79 1407.48,2550.2 1418.19,2550.2 1425.08,2543.31 v1(1433.07,2543.31) ; v1@1413.5,2374.02 1431.22,2391.73 U9.58
  Top Side w11.81: U8.5 1059.06,1905.51 1059.06,1933.07
  Top Side w19.68: DL1.2 v1(1681.1,2972.44) DL2.2
  Top Side w23.62: U6.6 923.23,2647.96 948.82,2622.37 v1(948.82,2618.11) ; U8.5 v2(1120.08,1899.61) ; U7.6 1072.83,2684.06 1073.82,2683.07 1082.68,2683.07 1097.38,2668.37 1122.97,2668.37 v1(1125.98,2665.35)
  Top Side w31.5: 980.32,2515.75 C19.2 ; 1059.06,1933.07 C14.2 ; v1(1125.98,1803.15) 1126.97,1802.17 1191.93,1802.17 C21.2
  Bottom Side w9.84: v1(1307.08,2519.68) 1307.08,2472.44 C17.2@1314.96,2464.57 ; C22.2 v1(1334.64,2200.78) ; C24.2 1354.33,2374.02 v1(1405.51,2374.02) ; v1(1433.07,2543.31) C26.2@1433.07,2586.61
  Bottom Side w19.68: TP1.1 v5@1755.91,2318.9 ; v5@1755.91,2314.96 v5(1763.78,2322.83)
  Bottom Side w59.06: D3.1 1054.13,2943.9 1122.64,2943.9 H7.1 1160.83,2943.9 1229.33,2943.9 D4.1
"3V3 Breakout 1": D3.2 D5.1 R19.1 U9.14 | length 919.9
  Top Side w9.84: v1(1145.67,2759.84) 1181.1,2724.41 1181.1,2646.07 1151.57,2616.55 U9.14@1151.57,2575.79
  Bottom Side w9.84: D3.2 1024.73,2825.66 1079.85,2825.66 v1(1145.67,2759.84)
  Bottom Side w31.5: 925.2,3244.09 948.82,3267.72 R19.1
  Bottom Side w78.74: D3.2 D5.1 924.21,3125.98 925.2,3126.97 925.2,3244.09
"3V3 Breakout 2": D4.2 D6.1 R18.1 U9.13 | length 938.6
  Top Side w9.84: v1(1145.67,2818.9) 1200.79,2763.78 1200.79,2637.8 1171.26,2608.27 U9.13@1171.26,2575.79
  Bottom Side w9.84: v1(1145.67,2818.9) 1181.92,2855.15 1296.1,2855.15 1366.14,2925.2 D4.2
  Bottom Side w31.5: R18.1 1346.46,3248.03 1366.14,3228.35
  Bottom Side w78.74: D4.2 D6.1 1366.14,3228.35
"3V3 Radio": C11.2 R2.1 TP7.1 U5.5 | length 116.1
  Top Side w39.37: R2.1@196.85,2389.76 C11.2@242.13,2389.76 ; C11.2@271.65,2385.83 294.29,2408.46 331.69,2408.46 U5.5
5V: C7.2 H6.1 L2.2 R3.2 R7.2 R13.1 R16.2 R17.1 TP8.1 U4.5 | length 542.5
  Top Side w31.5: v1(944.88,2858.27) R16.2
  Top Side w39.37: v2(216.54,2216.54) R13.1 ; v4(704.72,1696.85) 712.26,1689.32 771.31,1689.32 799.21,1661.42 868.11,1661.42 C7.2 ; v2(775.59,1807.09) 777.47,1805.2 826.69,1805.2 R17.1 ; R3.2 1218.5,671.26 v3(1220.47,669.29)
  Top Side w78.74: L2.2 v4(704.72,1696.85)
"5V Breakout 1": U6.4 U9.16 | length 393
  Top Side w9.84: U6.4 848.43,2705.27 871.5,2728.35 937.56,2728.35 974.41,2691.49 974.41,2641.73 998.03,2618.11 1095.47,2618.11 1112.2,2601.38 U9.16@1112.2,2575.79
"5V Breakout 2": U7.4 U9.15 | length 217.3
  Top Side w9.84: U7.4 998.03,2661.42 1025.59,2633.86 1102,2633.86 1131.89,2603.96 U9.15@1131.89,2575.79
D_N: H5.2 R21.1 | length 1028.7
  Top Side w15: R21.1@1612.2,2358.27 1767.64,2358.27 1879.33,2469.96 1879.33,3144.07 1879.55,3144.29 1879.55,3184.67 H5.2
D_P: H5.3 R20.1 | length 974.6
  Top Side w15: R20.1@1612.2,2413.39 1787.4,2413.39 1854.33,2480.32 H5.3
Freq1: S1.8 U9.29 | length 708.9
  Top Side w11.81: S1.8@425.2,2051.97 748.82,2051.97 970.47,2273.62 U9.29
Freq2: S1.7 U9.30 | length 742.2
  Top Side w11.81: S1.7@425.2,1951.97 688.19,1951.97 990.16,2253.94 U9.30
Freq3: S1.6 U9.31 | length 775.5
  Top Side w11.81: S1.6@425.2,1851.97 623.62,1851.97 1005.91,2234.25 U9.31
Freq4: S1.5 U9.32 | length 809.3
  Top Side w11.81: S1.5@424.8,1751.97 566.93,1751.97 1027.56,2212.6 U9.32@1043.31,2212.6
GND: C1.1 C2.1 C3.1 C4.1 C5.1 C7.1 C8.1 C9.1 C10.1 C11.1 C12.1 C13.1 C14.1 C15.1 C16.1 C17.1 C18.2 C19.1 C20.2 C21.1 C22.1 C23.2 C24.1 C25.2 C26.1 C28.1 D1.1 D5.2 D6.2 H1.2 H1.7 H1.10 H3.3 H4.1 H4.3 H5.5 H5.6 H6.2 H7.2 H8.5 H8.6 R8.1 R10.1 R14.1 R15.1 R24.1 S1.1 S1.2 S1.3 S1.4 S2.2 S3.2 T1.2 TP3.1 TP4.1 TP5.1 TP6.1 U1.9 U1.11 U1.18 U1.20 U2.2 U3.2 U3.5 U4.7 U4.EPAD U5.2 U6.2 U6.5 U7.2 U7.5 U8.2 U9.2 U9.17 U9.46 U9.60 VR1.3 VR1.6 | length 3262.5
  Top Side w9.84: C19.1@1031.5,2547.24 1042.32,2536.42 U9.17 ; 1066.93,2539.37 1086.5,2539.37 1106.18,2519.69 v1(1114.17,2519.69) ; v1(1366.14,2519.68) 1372.45,2519.68 1387.8,2535.03 U9.2@1387.8,2575.79 ; U9.46@1368.11,2140.75 U9.46 1368.11,2181.51 1385.82,2199.22 v1(1385.82,2200.78) ; v1(1415.11,2442.67) 1421.1,2442.67 1432.67,2431.1 U9.60
  Top Side w11.81: 303.15,2326.77 330.71,2354.33 v2(370.08,2354.33) 425.2,2354.33 433.07,2354.33
  Top Side w19.68: R15.1 356.3,948.82 382.06,923.06 382.06,909.28 v1(385.83,905.51) ; R8.1 397.64,677.17 v2(397.64,618.11) ; C12.1 925.2,1759.84 C13.1 ; U8.2 v2(1000,1862.2) 1003.94,1866.14 C14.1 ; T1.2 T1.2@1192.91,226.38
  Top Side w23.62: U5.2 v2(370.08,2354.33) ; 425.2,2354.33 C10.1@456.69,2322.83 ; v1(874.02,2633.86) 874.02,2638.12 884.84,2648.95 884.84,2691.93 U6.5 ; U6.2 v1(885.83,2858.27) ; U7.5 v1(1035.43,2740.16) U7.2
  Top Side w31.5: U2.2 141.45,2627.95 141.45,2563.27 141.73,2562.99 C4.1 141.73,2493.2 149.61,2485.32 v3(149.61,2480.32) ; C11.1 263.78,2326.77 299.21,2326.77 ; C9.1 425.2,2218.5 465.11,2258.42 465.11,2268.26 v2(468.5,2271.65) ; v2@468.5,2273.62 C10.1 ; v3(515.75,893.7) 551.18,858.27 584.65,858.27 R10.1 ; C19.1@1031.5,2547.24 1059.06,2547.24 1066.93,2539.37 ; v1(1125.98,1685.04) 1126.97,1686.02 1191.93,1686.02 C21.1 ; S3.2 v1(1476.38,3244.09) ; v1(1484.25,2751.97) 1485.76,2753.48 1546.78,2753.48 R24.1 ; C15.1 v1(1748.03,2736.22) ; C16.1@1799.21,2570.87 1797.24,2572.83 C16.1@1799.21,2574.8 ; C16.1@1803.15,2574.8 v1(1803.15,2633.86) ; v1(2358.27,3240.16) S2.2
  Top Side w39.37: T1.2 1190.94,155.51 v3(1192.91,153.54)
  Top Side w59.06: v2(870.08,1496.06) C7.1
  Top Side w78.74: D1.1@187.01,1432.09 D1.1 208.66,1436.02 v4(208.66,1543.31) ; v4(728.35,118.11) 807.96,118.11 C8.1
  Bottom Side w9.84: C23.2 1110.24,2515.75 v1(1114.17,2519.69) 1114.17,2586.61 C20.2 ; C25.2 1269.68,2322.83 1248.03,2344.49 v1(1248.03,2350.39) 1252.88,2355.24 1272.57,2355.24 C24.1 ; C18.2@1342.52,2559.05 v1@1378.89,2522.69 ; v1(1366.14,2519.68) v1@1375.88,2519.68 ; C17.1@1370.08,2464.57 1392.79,2441.86 1414.3,2441.86 v1(1415.11,2442.67) 1466.78,2442.67 C28.1 ; v1@1377.95,2520.62 1377.02,2519.68 v1@1375.88,2519.68 ; C26.1@1377.95,2586.61 1378.89,2585.68 v1@1378.89,2522.69 ; v1(1385.82,2200.78) 1385.82,2153.55 C22.1 ; v1@1375.88,2519.68 v1@1378.89,2522.69
  Bottom Side w31.5: R14.1@2007.87,3064.96 2009.84,3064.96 2009.84,3098.26 2027.56,3115.98 v1(2027.56,3118.11)
  Bottom Side w59.06: D5.2 1052.17,3125.98 1114.02,3064.13 1140.59,3064.13 H7.2 1142.87,3064.13 1169.44,3064.13 1231.3,3125.98 D6.2
  other v2: 925.2,1763.78
  other v4: 748.03,1003.94
"IMU I2C CLK": H1.3 R22.1 TP19.1 U1.23 U9.36 | length 61.3
  Top Side w9.84: R22.1 1171.26,2090.55 U9.36@1171.26,2140.75
"IMU I2C DATA": H1.4 R23.1 TP15.1 U1.24 U9.43 | length 121.2
  Top Side w7.87: R23.1 1309.06,2033.46 U9.43@1309.06,2140.75
"Joystick X axis": U9.3 VR1.5
"Joystick Y axis": U9.4 VR1.2
"LED Signal": TP12.1 U3.4 U9.34
NetC3_2: C3.2 U1.10
NetC4_2: C4.2 L1.1 U2.1 | length 164.2
  Top Side w39.37: L1.1 82.68,2484.25 82.68,2531.5 C4.2 87.46,2536.28 87.46,2627.95 U2.1
NetC6_1: C6.1 U4.1 | length 86.2
  Top Side w19.68: 839.03,925 925,925 v3(925.2,925.2)
NetC6_2: C6.2 D1.2 L2.1 U4.8
NetC8_2: C8.2 H4.2 Q1.3 | length 181.6
  Top Side w39.37: v6(181.1,417.32) Q1.3
  Top Side w78.74: v4(704.72,322.83) 708.66,318.9 806.65,318.9 C8.2
NetC9_2: C9.2 R13.2 U5.1 U5.3 | length 227.6
  Top Side w11.81: U5.1 330.71,2299.21 330.71,2271.65 354.33,2248.03 370.08,2248.03 377.95,2248.03 401.57,2271.65 401.57,2295.28 U5.3
  Top Side w31.5: R13.2 C9.2 370.08,2248.03
NetC10_2: C10.2 U5.4 | length 81.1
  Top Side w11.81: U5.4 442.91,2407.48 446.85,2407.48 448.82,2409.45
  Top Side w23.62: 440.94,2409.45 442.91,2407.48 C10.2
NetC12_2: C12.2 R17.2 U8.1 U8.3 | length 220.6
  Top Side w19.68: C12.2 C12.2@878.44,1862.2 ; U8.3 944.88,1826.77 915.35,1826.77 879.92,1862.2 C12.2@878.44,1862.2 ; U8.1 915.35,1899.61 C12.2@878.44,1862.2
  Top Side w31.5: R17.2 829.23,1861.71 C12.2@877.95,1861.71
NetC13_2: C13.2 U8.4 | length 57.9
  Top Side w11.81: U8.4 1055.12,1822.83 1055.12,1795.28
  Top Side w31.5: C13.2 1055.12,1787.4
NetC15_2: C15.2 U9.62 Y1.3 | length 359.2
  Top Side w9.84: 1523.44,2484.44 1594.49,2555.49 1594.49,2610.24 Y1.3 1649.61,2728.35 C15.2
  Top Side w10: U9.62 1477.44,2470.55 1509.55,2470.55 1523.44,2484.44
NetC16_2: C16.2 U9.61 Y1.1 | length 391.2
  Top Side w9.84: U9.61 1528,2450.79 1620.52,2543.31 1692.91,2543.31 Y1.1 1767.72,2515.75 C16.2@1799.21,2515.75
NetC18_1: C18.1 C20.1 C23.1 C25.1 L3.2 U9.8 U9.12 U9.24 U9.54 | length 1348
  Top Side w9.84: U9.24 1083.08,2372.05 1083.34,2371.79 1092.78,2371.79 v1(1098.43,2366.14) ; v1(1188.98,2519.68) 1190.94,2521.65 U9.12@1190.94,2575.79 ; v1(1261.81,2502.29) 1261.81,2516.91 1269.69,2524.79 U9.8 1269.69,2616.55 1279.53,2626.39 L3.2 ; v1(1405.51,2318.9) 1411.42,2312.99 U9.54 ; v1@1405.63,2318.9 v1@1411.28,2313.25
  Bottom Side w9.84: v1(1098.43,2366.14) 1098.43,2405.51 C23.1 ; C20.1 1173.23,2535.43 v1(1188.98,2519.68) ; v1(1261.81,2502.29) 1261.81,2516.91 1268.7,2523.8 1268.7,2554.13 1269.69,2555.12 C18.1@1279.53,2555.12 ; C25.1 1354.33,2318.9 v1(1405.51,2318.9)
  Bottom Side w39.37: v1(1098.43,2366.14) 1157.48,2366.14 ; v1(1188.98,2519.68) 1188.98,2397.64 ; v1(1261.81,2502.29) 1261.81,2470.47 1188.98,2397.64 ; v1(1405.51,2318.9) 1405.51,2295.28 1377.95,2267.72 1255.91,2267.72 1157.48,2366.14 ; 1157.48,2366.14 1188.98,2397.64
NetC27_1: C27.1 R24.2 | length 65
  Top Side w31.5: C27.1 R24.2
NetC27_2: C27.2 C28.2 L3.1 U9.64 | length 377.5
  Top Side w9.84: v1@1425.2,2492.13 v1(1415.36,2492.13) v1@1429.13,2505.91 ; U9.64@1488.19,2505.91 1488.19,2535.43
  Top Side w10: v1@1429.13,2505.91 1432.99,2509.76 1477.28,2509.76 U9.64
  Top Side w23.62: 1488.19,2535.43 1488.19,2562.99
  Top Side w39.37: L3.1 1488.19,2614.17 1488.19,2566.93
  Bottom Side w9.84: v1(1415.36,2492.13) C28.2@1464.57,2492.13 ; C28.2@1456.69,2507.87 C28.2
NetD2_1: D2.1 F1.1 Q1.2 | length 271.4
  Top Side w39.37: F1.1 D2.1 123.03,681.1 143.7,660.43 Q1.2
NetD2_2: D2.2 Q1.1 R8.2 | length 214.3
  Top Side w39.37: Q1.1 218.5,651.57 218.5,660.43 239.17,681.1 D2.2 R8.2
NetDL1_1: DL1.1 R25.1
NetDL2_1: DL2.1 R26.1
NetH1_1: H1.1 R1.2
NetH2_1: H2.1 R3.1 R4.2 | length 297.4
  Top Side w39.37: 1328.74,523.62 1332.68,523.62 R4.2
  Top Side w59.06: R3.1 H2.1 1155.12,523.62 1328.74,523.62
NetH2_2: H2.2 R4.1 T1.3 | length 326.2
  Top Side w39.37: 1324.8,425.2 1342.52,442.91 R4.1
  Top Side w59.06: T1.3 H2.2 1324.8,425.2
NetH3_1: H3.1 R7.1 U3.1
NetH3_2: H3.2 U3.3
NetH6_3: H6.3 U6.3 | length 433.5
  Top Side w9.84: H6.3 763.78,3107.87 763.78,2872.05 U6.3
NetH6_4: H6.4 U7.3 | length 805.6
  Top Side w9.84: H6.4 740.16,3184.25 740.16,2775.59 767.72,2748.03 958.66,2748.03 U7.3
NetH7_3: H7.3 R18.2 | length 118.5
  Bottom Side w31.5: H7.3 1141.73,3167.32 R18.2
NetH7_4: H7.4 R19.2 | length 78.7
  Bottom Side w31.5: R19.2 1066.93,3265.75 1138.98,3265.75 H7.4
NetL1_2: L1.2 R2.2 | length 81.5
  Top Side w39.37: L1.2 82.68,2366.14 108.27,2391.73 R2.2@137.8,2391.73
NetR5_2: R5.2 T1.1 | length 56.7
  Top Side w19.68: R5.2 1114.17,175.2 1114.17,226.38 T1.1
NetR6_1: R6.1 U3.6
NetR9_1: R9.1 R10.2 U4.3
NetR16_1: R16.1 U6.1 U7.1 | length 266.1
  Top Side w11.81: U6.1@930.12,2803.15 923.23,2796.26 U6.1 962.6,2826.77 1033.46,2826.77 1057.09,2850.39 1061.02,2850.39 R16.1 1065.94,2853.35 1065.94,2794.29 U7.1
NetR20_2: R20.2 U9.57 | length 95.1
  Top Side w9.84: U9.57 1517.72,2372.05 1527.56,2381.89 1527.56,2395.67 R20.2@1545.28,2413.39 ; R20.2@1551.18,2413.39 R20.2@1553.15,2413.39
NetR21_2: R21.2 U9.56 | length 78.2
  Top Side w9.84: U9.56 1547.24,2352.36 R21.2@1553.15,2358.27
NetTP2_1: TP2.1 U9.55 | length 99.2
  Top Side w9.84: U9.55 1517.72,2332.68 1531.5,2318.9 v5(1535.43,2318.9)
  Bottom Side w9.84: v5(1535.43,2318.9) TP2.1@1570.87,2318.9
nRST: H8.1 S2.1 U9.39 | length 2476.2
  Top Side w11.81: U9.39@1230.32,2140.75 1230.32,2080.71 v1(1232.28,2078.74) ; H8.1 2269.68,2944.49 S2.1
  Bottom Side w11.81: v1(1232.28,2078.74) 1992.13,2078.74 2476.38,2562.99 2476.38,2948.82 2401.57,3023.62 2348.82,3023.62 H8.1
"Piezo High": R5.1 TP16.1 U9.48
"Radio CE": U2.3 U9.26 | length 1017.7
  Top Side w7.87: U2.3 189.54,2567.02 208.66,2547.89 v1(208.66,2539.37) ; v1(921.26,2342.52) 932.24,2342.52 942.08,2332.68 U9.26
  Bottom Side w7.87: v1(208.66,2539.37) 263.78,2484.25 779.53,2484.25 v1(921.26,2342.52)
"Radio CSN": U2.4 U9.28 | length 976.8
  Top Side w7.87: U2.4 239.6,2570.87 247.47,2562.99 322.83,2562.99 366.14,2519.68 452.76,2519.68 679.13,2293.31 U9.28
"Radio IRQ": U2.8 U9.25 | length 717.5
  Top Side w7.87: U2.8 566.93,2629.92 807.09,2389.76 937.01,2389.76 974.41,2352.36 U9.25
"Radio MISO": TP13.1 U2.7 U9.27 | length 816.1
  Top Side w7.87: U2.7 389.76,2574.8 397.64,2566.93 511.81,2566.93 724.41,2354.33 842.52,2354.33 883.86,2312.99 U9.27
"Radio MOSI": TP14.1 U2.6 U9.22 | length 870.3
  Top Side w7.87: U2.6 339.71,2661.42 367.27,2688.98 527.56,2688.98 559.06,2657.48 657.48,2657.48 881.89,2433.07 968.5,2433.07 990.16,2411.42 U9.22
  Top Side w11.81: U2.6 U2.6@346.63,2636.84
"Radio SCK": TP18.1 U2.5 U9.21 | length 913.8
  Top Side w7.87: U2.5 289.65,2661.42 330.99,2702.76 726.38,2702.76 998.03,2431.1 U9.21
Sleep: S3.1 U9.47
STATUS0: R25.2 U9.5 | length 450.7
  Top Side w9.84: U9.5@1328.74,2575.79 1328.74,2643.7 1346.46,2661.42 1346.46,2822.83 1444.88,2921.26 R25.2
STATUS1: R26.2 U9.6 | length 519.9
  Top Side w9.84: U9.6@1309.06,2575.79 1309.06,2659.45 1318.9,2669.29 1318.9,2832.68 R26.2
SWCLK: H8.2 TP17.1 U9.53 | length 1322.1
  Top Side w11.81: U9.53 1816.93,2293.31 1996.06,2472.44 1996.06,2759.84 2119.09,2882.87 2308.07,2882.87 H8.2
SWDIO: H8.4 U9.51 | length 1294.6
  Top Side w11.81: U9.51 1860.24,2253.94 2051.18,2444.88 2051.18,2728.35 2105.71,2782.87 2308.07,2782.87 H8.4
USB_Detect: R11.1 R14.2 U9.10 | length 1120.5
  Top Side w9.84: v1@1227.01,2640.4 1230.32,2637.09 U9.10@1230.32,2575.79
  Top Side w11.81: v1@1227.01,2640.4 v1(1232.28,2645.67)
  Bottom Side w11.81: v1(1232.28,2645.67) 1232.28,2728.35 1354.33,2850.39 1909.45,2850.39 1978.35,2919.29 1978.35,2987.2 ; R11.1 1963.58,3001.97 1978.35,2987.2 ; R14.2 1993.11,3001.97 1978.35,2987.2
VBATT: C5.2 F1.2 R9.2 R12.2 TP11.1 U4.2 | length 147.1
  Top Side w39.37: v3(122.05,1011.81) F1.2 127.95,940.94 185.04,940.94 v5(196.85,929.13)
"VBATT Detection": R12.1 R15.2 U9.9 | length 2872.8